# Altium PCB MalletteV2_PCB_2L.PcbDoc
Units mm, origin at the board's own origin, x right, y up, seen from the top; angles counter-clockwise.
Board outline 430 x 289.62 mm, 2 copper layers (Top, Bottom), stack 1.54 mm thick; 75 components, 46 nets, 351 pads, 17 vias.
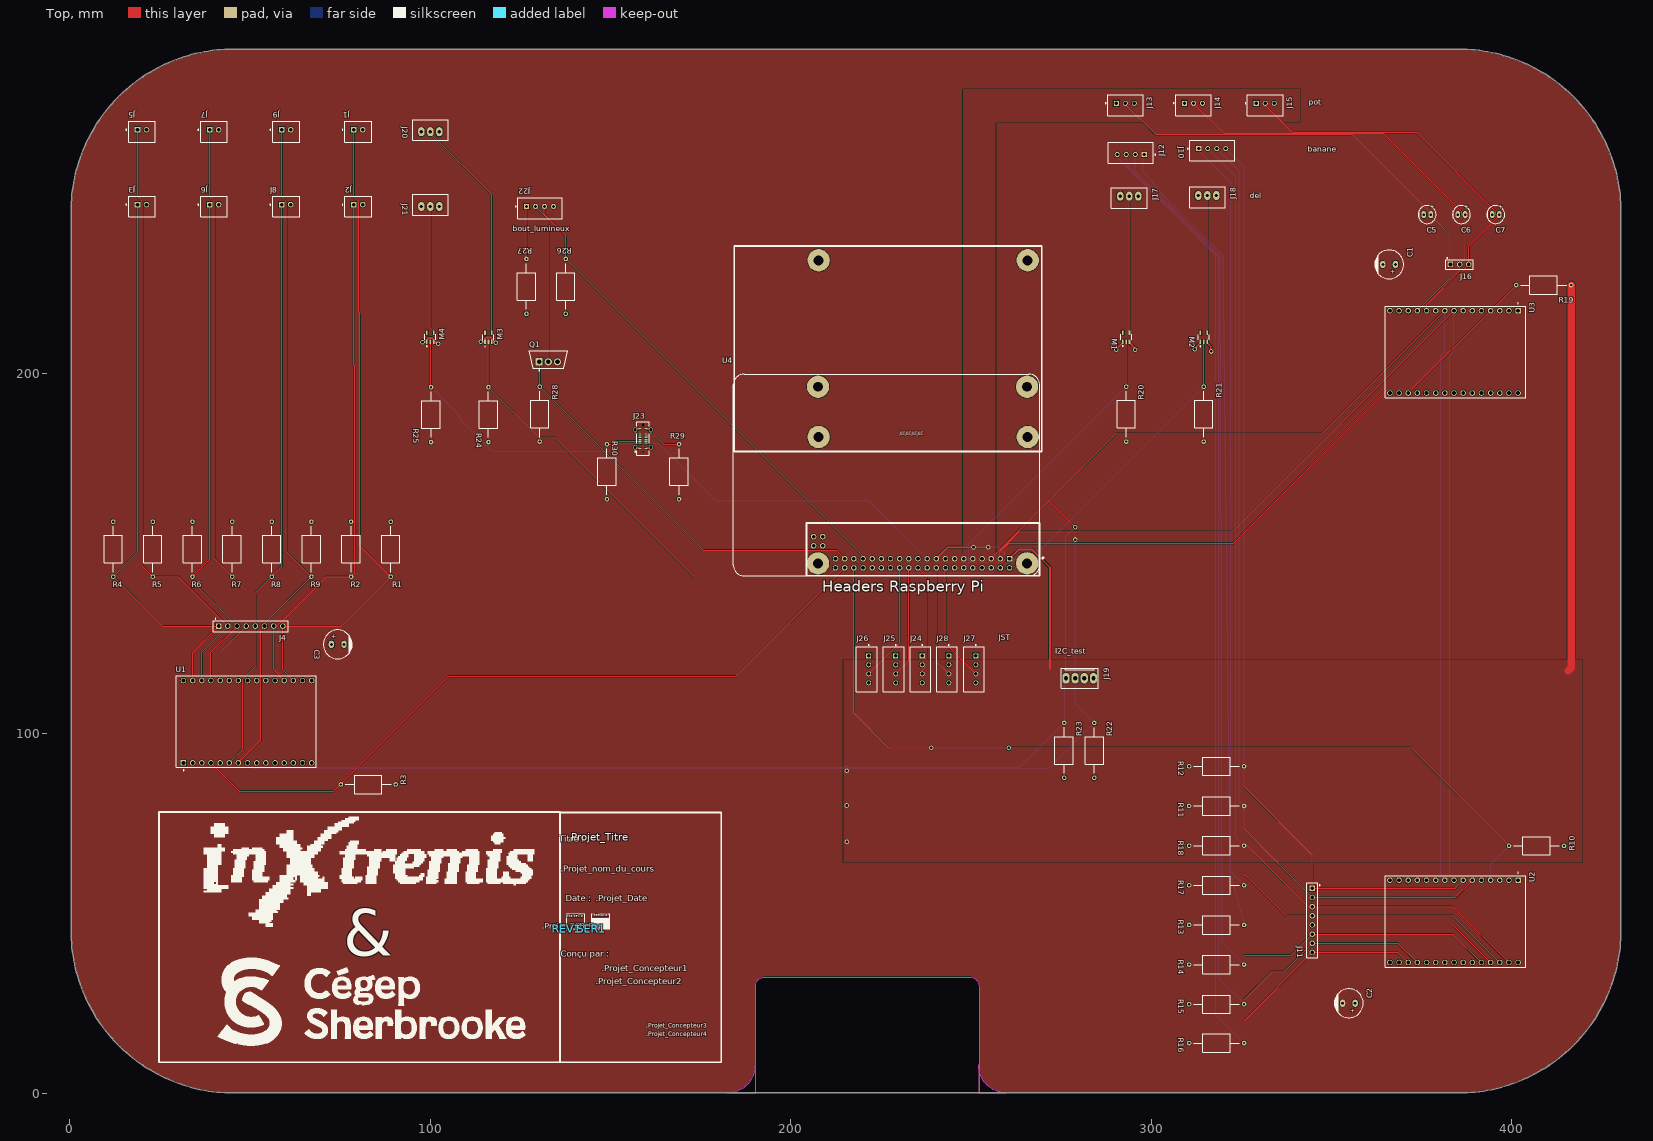
[diagram p0: Top view]
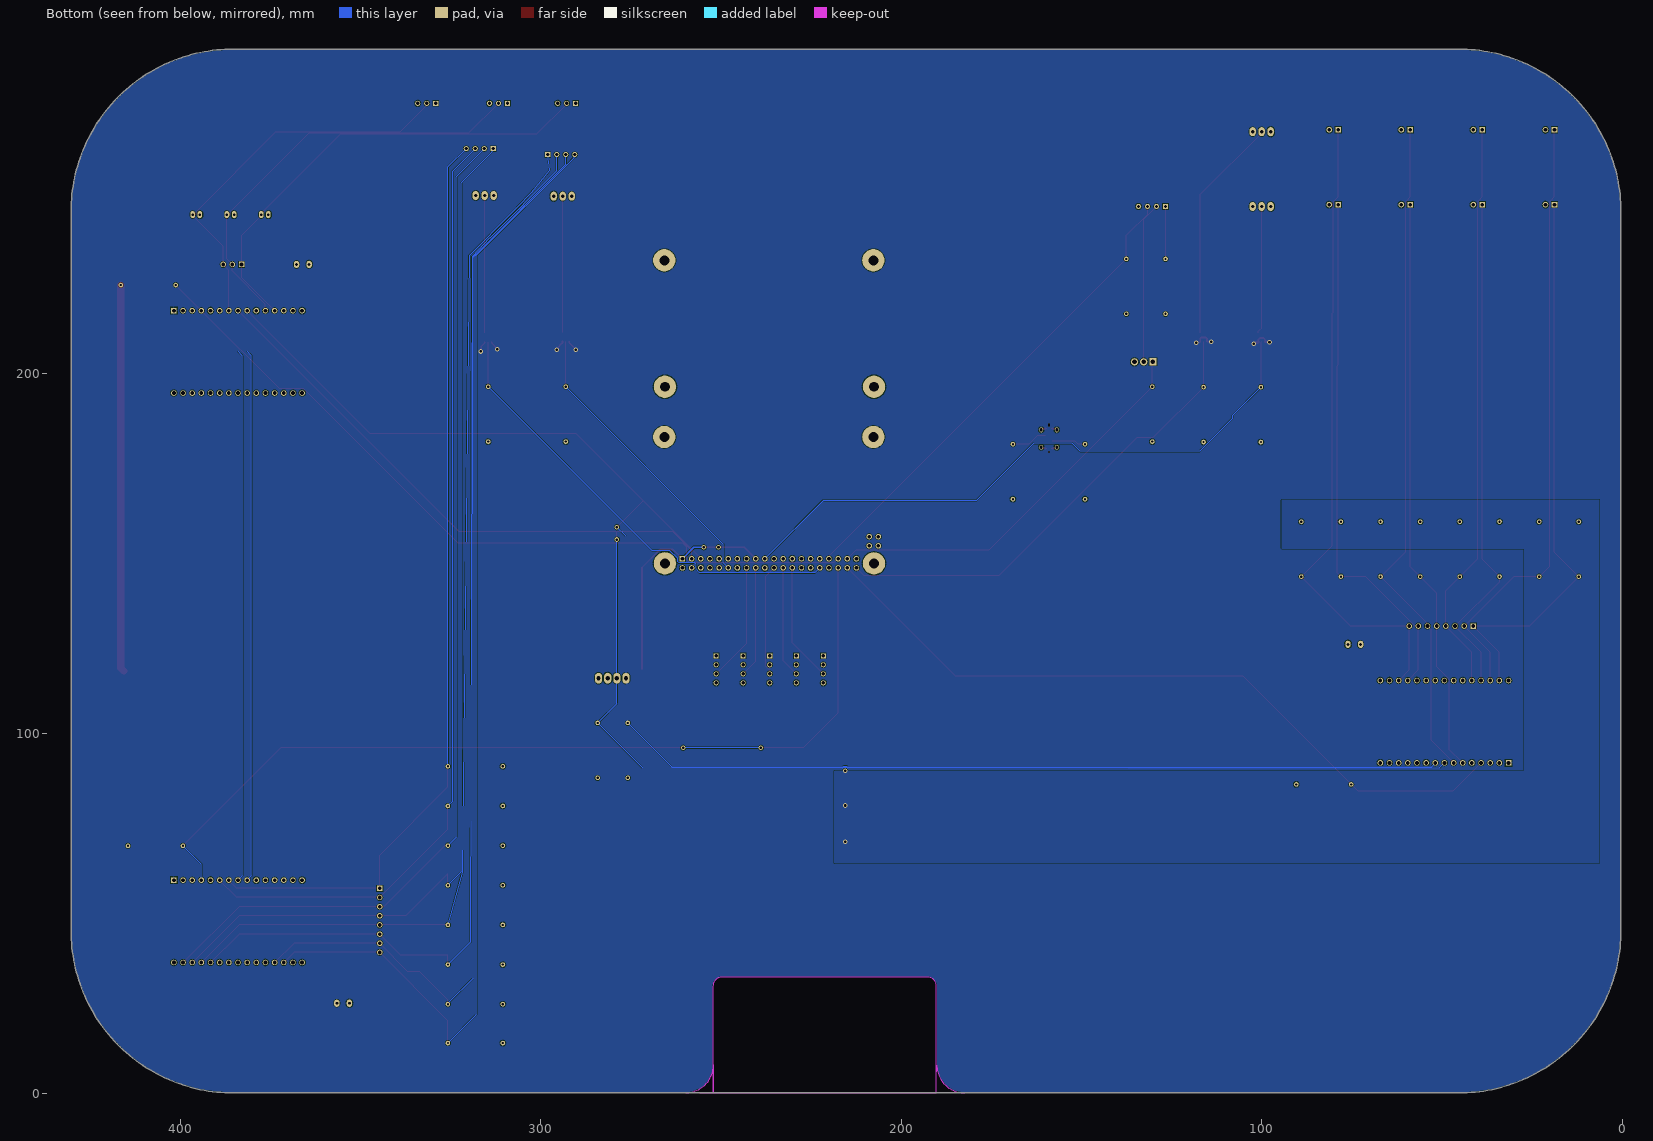
[diagram p1: Bottom view, seen from below]

## Layer stack, top to bottom
Top Solder: solder mask 0.0102, Solder Resist, Dk 3.5
Top: signal copper 0.035
Dielectric 1: core 1.47, FR-4, Dk 4.6
Bottom: signal copper 0.035
Bottom Solder: solder mask 0.0102, Solder Resist, Dk 3.5

## Board outline
0.318,45.254 0.318,244.873 cw(c45.318,244.873) 45.318,289.873 385.318,289.873 cw(c385.318,244.873) 430.318,244.873 430.318,45.254 cw(c385.318,45.254) 385.318,0.254 45.318,0.254 cw(c45.318,45.254)
cut-out: 190.246,0.254 190.246,29.845 cw(c192.786,29.845) 192.786,32.385 249.682,32.385 cw(c249.682,29.845) 252.222,29.845 252.222,0.254
cut-out: 190.09,8.001 cw(c182.343,8.001) 182.343,0.254 190.217,0.254 190.217,4.064
cut-out: 259.841,0.297 cw(c259.841,8.044) 252.094,8.044 252.094,0.17 255.904,0.17

## Design rules (kind name [scope] priority, off if disabled: settings)
BoardOutlineClearance [All] p1: gap=0.2 ignorepadtopadclearanceinfootprint=FALSE except(0: Arc-SplitContinuation Track-SplitContinuation SMDPad-SplitContinuation THPad-SplitContinuation Via-SplitContinuation Fill-SplitContinuation Poly-SplitContinuation Region-SplitContinuation Text-SplitContinuation)
Clearance [All] p1: gap=0.152 ignorepadtopadclearanceinfootprint=FALSE except(0: Arc-Hole Track-Hole SMDPad-Hole THPad-Hole Via-Hole Fill-Hole Poly-Hole Region-Hole Text-Hole; 0.127: Arc-Arc Arc-Track Track-Track SMDPad-Fill SMDPad-Poly SMDPad-Region; 0.2: Arc-SMDPad Track-SMDPad; 0.254: Arc-Via Track-Via Via-Via; 0.33: Arc-THPad Track-THPad; 0.5: THPad-THPad)
ComponentClearance [All] p1: gap=0.102 collisioncheckmode=3 verticalgap=0.102 showdistances=FALSE
HoleSize [All] p1: absolutevalues=TRUE maxlimit=6.3 minlimit=0.3 maxpercent=80.000 minpercent=20.000
HoleToHoleClearance [All] p1: gap=0.5 allowstackedmicrovias=FALSE
MinimumAnnularRing [All] p1: minimumring=0.1
MinimumSolderMaskSliver [All] p1: minsoldermaskwidth=0.1
PlaneClearance [All] p1: clearance=0.152
PlaneConnect [All] p1: pad.planeconnectstyle=Relief pad.reliefexpansion=0.508 pad.reliefentries=4 pad.reliefconductorwidth=0.254 pad.reliefairgap=0.254 via.planeconnectstyle=Direct via.reliefexpansion=0.508 via.reliefentries=4 via.reliefconductorwidth=0.254 via.reliefairgap=0.254
PolygonConnect [All] p1: thpad.connectstyle=Relief thpad.reliefconductorwidth=0.254 thpad.reliefentries=4 thpad.polygonreliefangle="90 Angle" thpad.airgapwidth=0.254 smdpad.connectstyle=Relief smdpad.reliefconductorwidth=0.254 smdpad.reliefentries=4 smdpad.polygonreliefangle="90 Angle" smdpad.airgapwidth=0.254 via.connectstyle=Direct via.reliefconductorwidth=0.254 via.reliefentries=4 via.polygonreliefangle="90 Angle" via.airgapwidth=0.254
RoutingVias [All] p1: holewidth=0.3 width=0.5 viastyle="Through Hole" minholewidth=0.3 minwidth=0.5 maxholewidth=6.3 maxwidth=6.5
SilkToSilkClearance [All] p1: silktosilkclearance=0.102
SilkToSolderMaskClearance [IsPad] p1: minsilkscreentomaskgap=0.024 clearancetoexposedcopper=FALSE
SolderMaskExpansion SolderMaskExpansion_Via [isVia] p1: expansion=0.102 istentingtop=TRUE
SolderMaskExpansion [All] p2: expansion=0.051 istentingtop=FALSE
Width [All] p1: maxlimit=25.4 minlimit=0.127 preferedwidth=0.152 minimp=50.000000 maximp=50.000000 favimp=50.000000
22 further rules are at their usual default settings.

## Classes and differential pairs
component class Alimentation_USB_Header: J23 R29 R30
component class Énigme3_Potentiomètres: C3 C5 C6 C7 J13 J14 J15 J16 R19 U3
component class Énigme2_Crocodile: C2 J10 J11 J12 R10 R11 R12 R13 R14 R15 R16 R17 R18 U2
component class Énigme1_Switch: C1 J1 J2 J3 J4 J5 J6 J7 J8 J9 R1 R2 R3 R4 R5 R6 R7 R8 R9 U1
component class Raspberry_Pi_4_ModelB: J17 J18 J19 J20 J21 J22 J24 J25 J26 J27 J28 ll M1 M2 M3 M4 Q1 R20 R21 R22 R23 R24 R25 R26 R27 R28 U4
component class Title_Page: REV1 SER1

## Components (designator, comment, footprint, x,y, rotation, side; value= is the part's Value field where it differs from the comment)
C1 "100 µF" "CAP AL TH D8 L3.5 H12.5" 366.012,230.124 r180 top
C2 "100 µF" "CAP AL TH D8 L3.5 H12.5" 354.838,25.146 r180 top
C3 "100 µF" "CAP AL TH D8 L3.5 H12.5" 74.295,124.718 r0 top
C5 "0.1µF" "CAP TH ALUM ELEC D5.00mm S2.00mm H12.00mm" 376.571,243.967 r0 top
C6 "0.1µF" "CAP TH ALUM ELEC D5.00mm S2.00mm H12.00mm" 386.08,243.967 r0 top
C7 "0.1µF" "CAP TH ALUM ELEC D5.00mm S2.00mm H12.00mm" 395.589,243.967 r0 top
J1 "B2B-XH-A(LF)(SN)" FP-B2B-XH-A_LF_SN-MFG 80,266.954 r0 top
J2 "B2B-XH-A(LF)(SN)" FP-B2B-XH-A_LF_SN-MFG 80,246.197 r0 top
J3 "B2B-XH-A(LF)(SN)" FP-B2B-XH-A_LF_SN-MFG 20,246.197 r0 top
J4 "CON_HDR_1X8" CON_HDR_1x8 50.165,129.794 r90 top
J5 "B2B-XH-A(LF)(SN)" FP-B2B-XH-A_LF_SN-MFG 20,266.954 r0 top
J6 "B2B-XH-A(LF)(SN)" FP-B2B-XH-A_LF_SN-MFG 40,246.197 r0 top
J7 "B2B-XH-A(LF)(SN)" FP-B2B-XH-A_LF_SN-MFG 40,266.954 r0 top
J8 "B2B-XH-A(LF)(SN)" FP-B2B-XH-A_LF_SN-MFG 60,246.197 r0 top
J9 "B2B-XH-A(LF)(SN)" FP-B2B-XH-A_LF_SN-MFG 60,266.954 r0 top
J10 "B4B-XH-A(LF)(SN)" FP-B4B-XH-A_LF_SN-MFG 316.932,261.73 r180 top
J11 "CON_HDR_1X8" CON_HDR_1x8 344.678,48.133 r0 top
J12 "B4B-XH-A(LF)(SN)" FP-B4B-XH-A_LF_SN-MFG 294.319,261.129 r0 top
J13 "B3B-XH-A(LF)(SN)" FP-B3B-XH-A_LF_SN-MFG 292.822,274.303 r0 top
J14 "B3B-XH-A(LF)(SN)" FP-B3B-XH-A_LF_SN-MFG 311.724,274.303 r0 top
J15 "B3B-XH-A(LF)(SN)" FP-B3B-XH-A_LF_SN-MFG 331.637,274.303 r0 top
J16 "CON_HDR_1X3" CON_HDR_1x3 385.572,230.124 r90 top
J17 "B3B-XH-A(LF)(SN)" "JST XH B3B-XH-A" 293.918,249.047 r0 top
J18 "B3B-XH-A(LF)(SN)" "JST XH B3B-XH-A" 315.575,249.247 r0 top
J19 "0022272041" "MOLEX KK 0022272041" 280.162,115.316 r180 top
J20 "B3B-XH-A(LF)(SN)" "JST XH B3B-XH-A" 100,266.954 r180 top
J21 "B3B-XH-A(LF)(SN)" "JST XH B3B-XH-A" 100,246.197 r180 top
J22 "B4B-XH-A(LF)(SN)" FP-B4B-XH-A_LF_SN-MFG 130.414,245.689 r180 top
J23 "USB4120-03-C" FP-USB4120-03-C-MFG 159,181.817 r90 top
J24 "B4B-XH-A(LF)(SN)" FP-B4B-XH-A_LF_SN-MFG 235.95,117.793 r90 top
J25 "B4B-XH-A(LF)(SN)" FP-B4B-XH-A_LF_SN-MFG 228.584,117.793 r90 top
J26 "B4B-XH-A(LF)(SN)" FP-B4B-XH-A_LF_SN-MFG 221.091,117.793 r90 top
J27 "B4B-XH-A(LF)(SN)" FP-B4B-XH-A_LF_SN-MFG 250.809,117.793 r90 top
J28 "B4B-XH-A(LF)(SN)" FP-B4B-XH-A_LF_SN-MFG 243.316,117.793 r90 top
M1 "74HC1G125GV-Q100H" SOT95P275X110-5N 293.05,209.956 r90 top
M2 "74HC1G125GV-Q100H" SOT95P275X110-5N 314.579,209.931 r90 top
M3 "74HC1G125GV-Q100H" SOT95P275X110-5N 116.102,209.892 r90 top
M4 "74HC1G125GV-Q100H" SOT95P275X110-5N 99.973,209.935 r90 top
Q1 "IRF520NPBF" FP-PG-TO220-3-MFG 132.715,203.708 r90 top
R1 "10 Kohm" Res_Template 89,143.51 r90 top
R2 "10 Kohm" Res_Template 78,143.51 r90 top
R3 "10 Kohm" Res_Template 75.149,85.844 r0 top
R4 "10 Kohm" Res_Template 12,143.51 r90 top
R5 "10 Kohm" Res_Template 23,143.51 r90 top
R6 "10 Kohm" Res_Template 34,143.51 r90 top
R7 "10 Kohm" Res_Template 45,143.51 r90 top
R8 "10 Kohm" Res_Template 56,143.51 r90 top
R9 "10 Kohm" Res_Template 67,143.51 r90 top
R10 "10 Kohm" Res_Template 399.281,68.834 r0 top
R11 "10 Kohm" Res_Template 310.515,79.873 r0 top
R12 "10 Kohm" Res_Template 310.515,90.873 r0 top
R13 "10 Kohm" Res_Template 310.515,46.873 r0 top
R14 "10 Kohm" Res_Template 310.515,35.873 r0 top
R15 "10 Kohm" Res_Template 310.515,24.873 r0 top
R16 "10 Kohm" Res_Template 310.515,14.097 r0 top
R17 "10 Kohm" Res_Template 310.515,57.873 r0 top
R18 "10 Kohm" Res_Template 310.515,68.873 r0 top
R19 "10 Kohm" Res_Template 401.278,224.409 r0 top
R20 "10 Kohm" Res_Template 293.05,180.975 r90 top
R21 "10 Kohm" Res_Template 314.579,180.975 r90 top
R22 "4.7 Kohm" Res_Template 284.226,102.911 r270 top
R23 "4.7 Kohm" Res_Template 275.844,87.677 r90 top
R24 "10 Kohm" Res_Template 116.102,180.848 r90 top
R25 "10 Kohm" Res_Template 100.203,180.848 r90 top
R26 "4.7 Kohm" Res_Template 137.541,231.648 r270 top
R27 "90 ohm" Res_Template 126.664,231.648 r270 top
R28 "4.7 Kohm" Res_Template 130.34,180.975 r90 top
R29 "5.1 Kohm" Res_Template 169,165 r90 top
R30 "5.1 Kohm" Res_Template 149,165 r90 top
REV1 "Revision Cartridge Mini" REV_REVISION_CARTRIDGE_MINI 137.89,45.84 r0 top
SER1 "Serial Cartridge MICRO" SER_SERIAL_CARTRIDGE_MICRO 144.748,45.84 r0 top
U1 "ESP32-C3-DEVKITC-02" XCVR_ESP32-C3-DEVKITC-02 48.895,103.251 r90 top
U2 "ESP32-C3-DEVKITC-02" XCVR_ESP32-C3-DEVKITC-02 384.394,47.879 r270 top
U3 "ESP32-C3-DEVKITC-02" XCVR_ESP32-C3-DEVKITC-02 384.394,205.867 r270 top
U4 "RASPBERRY_PI_4B_4GB" MODULE_RASPBERRY_PI_4B_4GB 226.557,171.693 r180 top

## Footprints (in the part's own frame and the unit in brackets; to place one, negate y for a bottom-side part, rotate by r counter-clockwise, add the part's x,y. Pads: shape width x height; smd on the part's side, far side on the other; paste and mask are expansions set on the pad)
"CAP AL TH D8 L3.5 H12.5" [mm] "8MM Diameter, 3.5MM Lead Spacing Aluminium Capacitor"
  oval 1.5x2 hole 0.8: 1(-1.75,0) 2(1.75,0)
  silkscreen extent -4,-4 4,4, body extent -4,-4 4,4, height 11.5
"CAP TH ALUM ELEC D5.00mm S2.00mm H12.00mm" [mm] "5mm Diameter 2mm Lead Spacing Aluminum Electrolytic Capacitors Radial, Can"
  oval 1.3x1.95 hole 0.7: 1(1,0) 2(-1,0)
  silkscreen extent -2.5,-2.5 2.5,2.5, body extent -2.51,-2.5 2.5,2.5, height 12
CON_HDR_1x3 [mil]
  rect 60x60 hole 40: 1(0,100)
  round 60 hole 40: 2(0,0) 3(0,-100)
  silkscreen extent -50,-150 75,150, body extent -49,-150 49,150, height 338
CON_HDR_1x8 [mil]
  rect 60x60 hole 40 mask+2.76: 1(0,350)
  round 60 hole 40 mask+2.76: 2(0,250) 3(0,150) 4(0,50) 5(0,-50) 6(0,-150) 7(0,-250) 8(0,-350)
  silkscreen extent -60,-410 85,410, body extent -50,-400 50,400, height 334
FP-B2B-XH-A_LF_SN-MFG [mm]
  rect 1.55x1.55 hole 1 paste-2539.97 mask+0: 1(-1.25,0.525)
  round 1.55 hole 1 paste-2539.97 mask+0: 2(1.25,0.525)
  silkscreen extent -4.5,-2.88 3.7,2.88, body extent -3.8,-2.98 3.8,2.98, height 0.25
FP-B3B-XH-A_LF_SN-MFG [mm]
  rect 1.4x1.4 hole 0.9 paste-2539.97 mask+0: 1(-2.5,0.525)
  round 1.4 hole 0.9 paste-2539.97 mask+0: 2(0,0.525) 3(2.5,0.525)
  silkscreen extent -5.6,-2.88 4.95,2.88, body extent -5.05,-2.98 5.05,2.98, height 0.25
FP-B4B-XH-A_LF_SN-MFG [mm]
  rect 1.4x1.4 hole 0.9 paste-2539.97 mask+0: 1(3.75,-0.525)
  round 1.4 hole 0.9 paste-2539.97 mask+0: 2(1.25,-0.525) 3(-1.25,-0.525) 4(-3.75,-0.525)
  silkscreen extent -6.2,-2.88 6.87,2.88, body extent -6.3,-2.98 6.3,2.98, height 0.25
FP-PG-TO220-3-MFG [mm]
  rect 2x2 hole 1.3 paste-2539.97 mask+0: 1(-0.61,2.54)
  round 2 hole 1.3 paste-2539.97 mask+0: 2(-0.61,0) 3(-0.61,-2.54)
  silkscreen extent -3.1,-5.38 2.41,5.38, body extent -2.51,-5.48 2.51,5.48, height 0.25
FP-USB4120-03-C-MFG [mm]
  rrect100% 1.35x1.1 hole 0.6 slot 0.85 at 0 deg paste-2539.97 mask+0: 1(-2.4,2.15) 2(2.4,2.15) 3(-2.4,-2.15) 4(2.4,-2.15)
  rect 0.3x0.87 smd paste+0 mask+0: A1(-2.75,0.865) A4(-1.25,0.865) A5(-0.75,0.865) A6(-0.25,0.865) A7(0.25,0.865) A8(0.75,0.865) A9(1.25,0.865) A12(2.75,0.865) B1(2.75,-0.865) B4(1.25,-0.865) B5(0.75,-0.865) B6(0.25,-0.865) B7(-0.25,-0.865) B8(-0.75,-0.865) B9(-1.25,-0.865) B12(-2.75,-0.865)
  round 0.52 hole 0.52 unplated paste-2539.97 mask+0: ""(-3.75,0)
  rrect100% 0.72x0.52 hole 0.52 slot 0.72 at 0 deg unplated paste-2539.97 mask+0: ""(3.75,0)
  silkscreen extent -4.59,-1.71 4.59,2.3, body extent -4.69,-2.8 4.69,2.8, height 0.25
"JST XH B3B-XH-A" [mm]
  oval 1.75x2.5 hole 0.9: 1(-2.5,0) 2(0,0) 3(2.5,0)
  silkscreen extent -4.95,-3.38 4.95,2.38, body extent -4.95,-3.38 4.95,2.38, height 7
MODULE_RASPBERRY_PI_4B_4GB [mil]
  rect 60x60 / inner round 60 / far side rect 60x60 hole 40: 1(-1343.7,914.57)
  round 60 hole 40: 2(-1343.7,1014.57) 3(-1243.7,914.57) 4(-1243.7,1014.57) 5(-1143.7,914.57) 6(-1143.7,1014.57) 7(-1043.7,914.57) 8(-1043.7,1014.57) 9(-943.7,914.57) 10(-943.7,1014.57) 11(-843.7,914.57) 12(-843.7,1014.57) 13(-743.7,914.57) 14(-743.7,1014.57) 15(-643.7,914.57) 16(-643.7,1014.57) 17(-543.7,914.57) 18(-543.7,1014.57) 19(-443.7,914.57) 20(-443.7,1014.57) 21(-343.7,914.57) 22(-343.7,1014.57) 23(-243.7,914.57) 24(-243.7,1014.57) 25(-143.7,914.57) 26(-143.7,1014.57) 27(-43.7,914.57) 28(-43.7,1014.57) 29(56.3,914.57) 30(56.3,1014.57) 31(156.3,914.57) 32(156.3,1014.57) 33(256.3,914.57) 34(256.3,1014.57) 35(356.3,914.57) 36(356.3,1014.57) 37(456.3,914.57) 38(456.3,1014.57) 39(556.3,914.57) 40(556.3,1014.57) 41(796.46,673.5) 42(796.46,773.5) 43(696.46,673.5) 44(696.46,773.5)
  round 244.09 hole 108.27: S1(-1535.43,964.57) S2(748.03,964.57) S3(748.03,-964.57) S4(-1535.43,-964.57)
  silkscreen extent -1717,-1102 1673,1102
"MOLEX KK 0022272041" [mm]
  oval 2x3 hole 1.2: 1(-3.81,0) 2(-1.27,0) 3(1.27,0) 4(3.81,0)
  silkscreen extent -5.08,-2.79 5.08,2.79, body extent -5.08,-2.9 5.08,2.9, height 11.7
Res_Template [mm]
  round 1.27 hole 0.635: 1(0,0) 2(15.24,0)
  silkscreen extent 1.27,-2.54 13.97,2.54
REV_REVISION_CARTRIDGE_MINI [mm]
  silkscreen extent 0,0 5,4.08
SER_SERIAL_CARTRIDGE_MICRO [mm]
  silkscreen extent 0,0 5.02,4.08
SOT95P275X110-5N [mm]
  rrect25% 1.22x0.5 smd: 1(-1.245,0.95) 2(-1.245,0) 3(-1.245,-0.95) 4(1.245,-0.95) 5(1.245,0.95)
  silkscreen extent -2.6,-1.52 0.75,1.52, body extent -1.38,-1.45 1.38,1.45, height 1.1
XCVR_ESP32-C3-DEVKITC-02 [mm]
  rect 1.53x1.53 hole 1.02: 1(-11.43,17.392)
  round 1.53 hole 1.02: 2(-11.43,14.852) 3(-11.43,12.312) 4(-11.43,9.772) 5(-11.43,7.232) 6(-11.43,4.692) 7(-11.43,2.152) 8(-11.43,-0.388) 9(-11.43,-2.928) 10(-11.43,-5.468) 11(-11.43,-8.008) 12(-11.43,-10.548) 13(-11.43,-13.088) 14(-11.43,-15.628) 15(-11.43,-18.168) 16(11.43,-18.168) 17(11.43,-15.628) 18(11.43,-13.088) 19(11.43,-10.548) 20(11.43,-8.008) 21(11.43,-5.468) 22(11.43,-2.928) 23(11.43,-0.388) 24(11.43,2.152) 25(11.43,4.692) 26(11.43,7.232) 27(11.43,9.772) 28(11.43,12.312) 29(11.43,14.852) 30(11.43,17.392)
  silkscreen extent -13.56,-19.46 12.7,19.46

## Part data
C1 C2 C3: library part 860020674015, "CAP ALUM 100UF 20% 50V RADIAL", Device Package="Radial, Can", Lifetime @ Temp.="2000 Hrs @ 105°C", manufacturer="Würth Elektronik", Operating Temperature="-40°C ~ 105°C", Ripple Current @ High Frequency="306 mA @ 100 kHz", Ripple Current @ Low Frequency="200 mA @ 120 Hz", Supplier Part Number 1=732-8861-1-ND, Tolerance=±20%, Voltage - Rated="50 V", Applications="General Purpose", Capacitance="100 µF", ComponentLink1Description=Datasheet, ComponentLink1URL=https://katalog.we-online.de/pbs/datasheet/860020674015.pdf, componentlink2description="DigiKey Link", componentlink2url=https://www.digikey.com/en/products/detail/würth-elektronik/860020674015/5727098, Height - Seated (Max)="0.492\" (12.50mm)", lastupdated="2024-06-03 20:06:11", Lead Spacing="0.138\" (3.50mm)", Lifecycle Status=Active, Minimum Order=1, Mounting Type="Through Hole", Package / Case="Radial, Can", Packaging=TapeAndBox, Part Number=860020674015, Part Status=Active, partid=7238, Polarization=Polar, Price=0.16, Series=WCAP-ATG5, Size / Dimension="0.315\" Dia (8.00mm)", Supplier 1=DigiKey
C5 C6 C7: library part UKL2A0R1KDD, "CAP ALUM 0.1UF 10% 100V RADIAL", Device Package="Radial, Can", Lifetime @ Temp.="2000 Hrs @ 85°C", manufacturer=Nichicon, Operating Temperature="-40°C ~ 85°C", Ripple Current @ High Frequency="4.2mA @ 10kHz", Ripple Current @ Low Frequency="2.1mA @ 120Hz", Supplier Part Number 1=493-16876-ND, Tolerance=±10%, Voltage - Rated=100V, Applications="General Purpose", Capacitance=0.1µF, ComponentLink1Description=Datasheet, ComponentLink1URL=http://nichicon-us.com/english/products/pdfs/e-ukl.pdf, componentlink2description="DigiKey Link", componentlink2url=http://digikey.com/product-detail/en/nichicon/UKL2A0R1KDD/493-16876-ND/2598554, Height - Seated (Max)="0.472\" (12.00mm)", lastupdated="2020-09-04 23:28:57", Lead Spacing="0.079\" (2.00mm)", Lifecycle Status=Active, Minimum Order=1, Mounting Type="Through Hole", Package / Case="Radial, Can", Packaging=Bulk, Part Number=UKL2A0R1KDD, Part Status=Active, partid=21583, Polarization=Polar, Price=0.39, Series=UKL, Size / Dimension="0.197\" Dia (5.00mm)", Supplier 1=DigiKey
J1 J2 J3 J5 J6 J7 J8 J9: library part CMP-2000-05888-3, "CONN HEADER VERT 2POS 2.5MM", Color=Natural, Contact Resistance=20mR, Current Rating=3A, Housing Color=White, Insulation Resistance=1GR, Max Operating Temperature=85°C, Max Voltage Rating (AC)=250V, Min Operating Temperature=-25°C, Connector Type="Male Pin", Contact Material=Brass, Contact Plating=Tin, Contact Type="Male Pin", Depth=5.75mm, Fastening Type=Detent, Housing Material=Polyamide, Lead Free="Lead Free", Lead Pitch=2.5mm, Length=7.4mm, Max Current Rating=3A, Max Voltage Rating (DC)=250V, Mount="Through Hole", Number of Contacts=2, Number of Positions=2, Number of Rows=1, Orientation=Straight, Packaging=Bulk, Pitch=2.5mm, REACH SVHC="No SVHC", Series=XH, Termination=Solder, Voltage Rating=250V, Voltage Rating (AC)=250V, Wire/Cable Gauge=22AWG
J4 J11: library part CMP-005-000004-1, "CON - Header 1X8 pins, 100Mils - TH-8", Package=TH-8, Assembly Type=TH, Component Type=Standard, Design Item ID=CON_HDR_1X8, Pin Count=8, Polarized=No, Source=CEGEP_SHERBROOKE_TGE_LIBRARY.SchLib
J10 J12 J22 J24 J25 J26 J27 J28: library part CMP-17439-000250-1, "CONN HEADER VERT 4POS 2.5MM", Color=Natural, Contact Resistance=20mR, Current Rating=3A, Flammability Rating="UL94 V-0", Housing Color=White, Insulation Resistance=1GR, Max Operating Temperature=85°C, Max Voltage Rating (AC)=250V, Min Operating Temperature=-25°C, Package Quantity=500, Connector Type=Header, Contact Finish - Mating=TIN, Contact Material=Brass, Contact Plating=Tin, Contact Shape=Square, Contact Type="Male Pin", Depth=5.75mm, Fastening Type=Detent, Gender=Male, Housing Material=Polyamide, Insulation Color=Natural, Insulation Material=Nylon, Lead Free="Lead Free", Lead Pitch=2.5mm, Length=12.4mm, Mated Stacking Heights=9.8mm, Material=Polyamide, Max Current Rating=3A, Max Voltage Rating (DC)=250V, Mount="Through Hole", Number of Contacts=4, Number of Positions=4, Number of Rows=1, Orientation=Straight, Packaging=Bulk, Pitch=2.5mm, REACH SVHC="No SVHC", Series=XH, Termination=Solder, Voltage Rating=250V, Voltage Rating (AC)=250V, Wire/Cable Gauge=22AWG
J13 J14 J15: library part CMP-17439-000014-3, "CONN HEADER VERT 3POS 2.5MM", Color=Natural, Contact Resistance=20mR, Current Rating=3A, Flammability Rating="UL94 V-0", Housing Color=White, Insulation Resistance=1GR, Max Operating Temperature=85°C, Max Voltage Rating (AC)=250V, Min Operating Temperature=-25°C, Connector Type=Header, Contact Finish - Mating=TIN, Contact Material=Brass, Contact Plating=Tin, Contact Shape=Square, Contact Type="Male Pin", Depth=5.75mm, Fastening Type=Detent, Gender=Male, Housing Material=Polyamide, Insulation Color=Natural, Insulation Material=Nylon, Lead Free="Lead Free", Lead Pitch=2.5mm, Length=9.9mm, Max Current Rating=3A, Max Voltage Rating (DC)=250V, Mount="Through Hole", Number of Contacts=3, Number of Positions=3, Number of Rows=1, Orientation=Straight, Packaging=Bulk, Pitch=2.5mm, REACH SVHC="No SVHC", Series=XH, Termination=Solder, Voltage Rating=250V, Voltage Rating (AC)=250V, Wire/Cable Gauge=22AWG
J16: library part CMP-005-000001-1, "CON - Header 1x3 pins-100Mils - TH", Package=TH, Assembly Type=TH, Component Type=Standard, Design Item ID=CON_HDR_1X3, Pin Count=3, Polarized=No, Source=CEGEP_SHERBROOKE_TGE_LIBRARY.SchLib
J17 J18 J20 J21: "CONN HEADER VERT 3POS 2.5MM", Current Rating (Amps)=3A, Insulation Color=Natural, manufacturer="JST Sales America Inc.", Material Flammability Rating="UL94 V-0", Operating Temperature="-25°C ~ 85°C", Supplier Part Number 1=455-2248-ND, Voltage Rating=250V, ComponentLink1Description=Datasheet, ComponentLink1URL=http://www.jst-mfg.com/product/pdf/eng/eXH.pdf, componentlink2description="DigiKey Link", componentlink2url=http://digikey.com/product-detail/en/jst-sales-america-inc/B3B-XH-A-LF-SN/455-2248-ND/1651046, Connector Type=Header, Contact Finish - Mating=Tin, Contact Finish - Post=Tin, Contact Length - Post="0.134\" (3.40mm)", Contact Material=Brass, Contact Shape=Square, Contact Type="Male Pin", Fastening Type="Detent Lock", Insulation Height="0.276\" (7.00mm)", Insulation Material="Polyamide (PA66), Nylon 6/6", lastupdated="2020-01-12 23:46:22", Lifecycle Status=Active, Minimum Order=1, Mounting Type="Through Hole", Number of Positions=3, Number of Positions Loaded=All, Number of Rows=1, Packaging=Bulk, Part Number=B3B-XH-A(LF)(SN), Part Status=Active, partid=68, Pitch - Mating="0.098\" (2.50mm)", Price=0.19, Series=XH, Shrouding="Shrouded - 4 Wall", Style="Board to Cable/Wire", Supplier 1=DigiKey, Termination="Press-Fit, Solder"
J19: "CONN HEADER VERT 4POS 2.54MM", Part Number=0022272041
J23: library part CMP-03329-113696351-1, "USB4120-03-C 16 Position 48 VDC USB Type C Vertical USB 2.0 Receptacle Connector", NexarPartId=113696351, Number of Pins=16, Orientation=Vertical
M1 M2 M3 M4: library part "74HC1G125GV-Q100H NXP Semiconductors", "Bus Driver, HC/UH Series, 1-Func, 1-Bit, True Output, CMOS, PDSO5", Supply Voltage-Max=6V, Supply Voltage-Min=2V, Supply Voltage-Nominal=5V, ComponentLink1Description="New link", ComponentLink1URL=https://www.snapeda.com/parts/74HC1G125GV-Q100H/Nexperia/view-part/?welcome=home&ref=octopart, Surface Mount=Yes
Q1: library part CMP-32901-000276-1, "MOSFET N-CH 100V 9.7A TO-220AB", Case/Package=TO-220, Continuous Drain Current (ID)=9.7A, Drain To Source Breakdown Voltage=100V, Drain To Source Resistance=200mR, Gate to Source Voltage (Vgs)=20V, Input Capacitance=330pF, Max Operating Temperature=175°C, Max Power Dissipation=48W, Min Operating Temperature=-55°C, Threshold Voltage=4V, Contact Plating=Tin, Drain to Source Voltage (Vdss)=100V, Element Configuration=Single, Halogen Free="Halogen Free", Height=0.6inch, Lead Free="Lead Free", Length=0.414inch, Max Dual Supply Voltage=100V, Mount="Through Hole", Number of Pins=3, Packaging=Rail/Tube, Power Dissipation=48W, Rds On Max=200mR, REACH SVHC="No SVHC", Rise Time=23ns, RoHS Compliant=Yes, Turn-Off Delay Time=32ns, Turn-On Delay Time=4.5ns, Width=0.185inch
R1 R2 R3 R4 R5 R6 R7 R8 R9 R10 R11 R12 R13 R14 R15 R16 R17 R18 R19 R20 R21 R22 R23 R24 R25 R26 R27 R28 R29 R30: library part "470 ohm", "Custom Semiconductor Resistor"
REV1: library part REV_REVISION_CARTRIDGE_MINI, "REV - REVISION CARTRIDGE MINI", Assembly Type=NONE, Rule="Component Clearance Constraint [Horizontal Clearance = 0mil    Vertical Clearance = 0mil]"
SER1: library part SER_SERIAL_CARTRIDGE_MICRO, "SER - SERIAL CARTRIDGE MICRO", Assembly Type=NONE, Rule="Component Clearance Constraint [Horizontal Clearance = 0mil    Vertical Clearance = 0mil]"
U1 U2 U3: "Development Boards & Kits - Wireless (Engineering Samples) ESP32-C3 General-Purpose Development Board, embeds ESP32-C3-WROOM-02, 4 MB Flash, with Pin Header", Package=None, Availability="In Stock", Check_prices=https://www.snapeda.com/parts/ESP32-C3-DevKitC-02/Espressif+Systems/view-part/?ref=eda, ComponentLink1Description="New link", ComponentLink1URL=https://docs.espressif.com/projects/esp-idf/en/v5.2/esp32c3/hw-reference/esp32c3/user-guide-devkitc-02.html, MF="Espressif Systems", MP=ESP32-C3-DevKitC-02, Price=12.94$, Purchase-URL=https://www.digikey.ca/en/products/detail/espressif-systems/ESP32-C3-DEVKITC-02/14553009?gclsrc=aw.ds&&utm_adgroup=&utm_source=google&utm_medium=cpc&utm_campaign=PMax%20Product_Low%20ROAS%20Categories&utm_term=&productid=14553009&utm_content=&utm_id=go_cmp-20291741422_adg-_ad-__dev-c_ext-_prd-14553009_sig-CjwKCAiAh6y9BhBREiwApBLHC_cF2gDRygapSaJLXU2Wdnx3_ghIaBBBCKe6dQeqHq45MeITmry7OBoCG4EQAvD_BwE&gad_source=1&gclid=CjwKCAiAh6y9BhBREiwApBLHC_cF2gDRygapSaJLXU2Wdnx3_ghIaBBBCKe6dQeqHq45MeITmry7OBoCG4EQAvD_BwE, SnapEDA_Link=https://www.snapeda.com/parts/ESP32-C3-DevKitC-02/Espressif+Systems/view-part/?ref=snap
U4: "BCM2711 Raspberry Pi 4 Model B 4GB - ARMÂ® CortexÂ®-A72 MPU Embedded Evaluation Board", Package=None, Availability="In Stock", Check_prices=https://www.snapeda.com/parts/RASPBERRY%20PI%204B/4GB/Raspberry+Pi/view-part/?ref=eda, MF="Raspberry Pi", MP="RASPBERRY PI 4B/4GB", Price=None, Purchase-URL="https://pricing.snapeda.com/search/part/RASPBERRY PI 4B/4GB/?ref=eda", SnapEDA_Link=https://www.snapeda.com/parts/RASPBERRY%20PI%204B/4GB/Raspberry+Pi/view-part/?ref=snap

## Free pads (board coordinates)
  round 6.2 hole 2.75: 2(207.728,182.245) 2(207.728,231.267) 2(265.728,182.245) 2(265.728,231.267)

## Via types
v1: diameter 1.27, hole 0.711, Top to Bottom, tented both sides, 17 vias

## Nets (pads, with @x,y where several pads share a name; then routed paths per layer and width w, separated by ;. In a path a pad name is that pad's centre, name@x,y a point inside that pad or via, vN(x,y) a via of type N, cw(c..) or ccw(c..) an arc to the next point about the centre after c; other vN are vias at no path point)
3V3: J13.1 J14.1 J15.1 J19.1 J24.2 J25.2 J26.2 J27.2 J28.2 R1.2 R2.2 R3.2 R4.2 R5.2 R6.2 R7.2 R8.2 R9.2 R10.2 R19.2 R22.2 R23.1 U4.1 U4.17 | length 172.9
  Top w0.5: U4.17 243.551,151.647 v1(250.698,151.647) v1(254.762,151.647) ; U4.1 263.227,151.003 266.951,151.003 271.907,146.047 271.907,117.793
  Top w2: 415.671,117.348 416.518,118.195 R19.2
  Bottom w0.5: v1(254.762,151.647) 257.503,151.647 U4.1
  other v1: 215.519,70 215.519,80 215.519,89.685
GND: C1.2 C2.2 C3.2 C5.2 C6.2 C7.2 J1.2 J2.2 J3.2 J5.2 J6.2 J7.2 J8.2 J9.2 J13.3 J14.3 J15.3 J17.3 J18.3 J19.2 J20.3 J21.3 J22.4 J23.1 J23.2 J23.3 J23.4 J23.A1 J23.A12 J23.B1 J23.B12 J24.4 J25.4 J26.4 J27.4 J28.4 M1.1 M1.3 M2.1 M2.3 M3.1 M3.3 M4.1 M4.3 Q1.3 R11.1 R12.1 R13.1 R14.1 R15.1 R16.1 R17.1 R18.1 R20.1 R21.1 R24.1 R25.1 R28.1 R29.1 R30.1 U1.1 U1.5 U1.10 U1.15 U1.16 U1.17 U1.20 U1.23 U1.25 U1.30 U2.1 U2.5 U2.10 U2.15 U2.16 U2.17 U2.20 U2.23 U2.25 U2.30 U3.1 U3.5 U3.10 U3.15 U3.16 U3.17 U3.20 U3.23 U3.25 U3.30 U4.6 U4.9 U4.14 U4.20 U4.25 U4.30 U4.34 U4.39 U4.S1 U4.S2 U4.S3 U4.S4 | length 30.4
  Top w0.5: U1.15 U1.15@67.155,91.729 ; v1(97.814,208.58) v1@97.869,208.635 ; M4.1@99.023,208.635 M4.1 99.023,209.05 99.148,209.175 99.148,209.325 99.573,209.75 100.373,209.75 100.923,209.2 M4.3 ; R25.1@100.203,180.64 R25.1 ; v1(114.022,208.647) M3.1 115.152,209.599 115.445,209.892 116.759,209.892 117.052,209.599 M3.3 117.052,208.508 117.994,208.508 v1(118.134,208.368) ; J23.1 157.09,179.177 157.94,179.177 158.05,179.067 J23.A1 ; J23.2 157.09,184.457 157.94,184.457 158.05,184.567 J23.A12 ; J23.B12 159.95,179.067 160.06,179.177 160.91,179.177 J23.3 ; J23.B1 159.95,184.567 160.06,184.457 160.91,184.457 J23.4 ; v1(290.292,206.502) 290.292,206.543 292.1,208.351 M1.1 ; M1.3 294,208.351 295.443,206.908 295.443,206.649 v1(295.59,206.502) ; v1(312.039,206.606) 312.039,206.736 313.629,208.326 M2.1 ; M2.3 315.529,208.326 316.494,207.361 316.494,206.117 v1(316.636,205.976)
  Top w0.75: v1@97.869,208.635 M4.1@99.023,208.635 ; M4.3 100.923,208.58 101.048,208.455 101.679,208.455 101.991,208.142 v1(102.132,208.142)
NetJ17_2: J17.2 M1.4 | length 37.9
  Top w0.15: J17.2 293.959,249.006 293.959,211.242 M1.4
NetJ18_2: J18.2 M2.4 | length 38.1
  Top w0.15: M2.4 315.552,211.199 315.552,249.224 J18.2
  Top w1.25: J18.2 J18.2@315.58,249.252
NetJ20_2: J20.2 M3.4 | length 62.9
  Top w0.15: J20.2 100,266.579 117.052,249.527 M3.4
NetJ21_2: J21.2 M4.4 | length 35.4
  Top w0.15: J21.2 100,212.463 100.923,211.54 M4.4
NetJ22_1: J22.1 R27.1 | length 14.6
  Top w0.15: R27.1 J22.1
NetJ22_2: J22.2 Q1.2 | length 44.6
  Top w0.15: J22.2 132.715,242.663 Q1.2
NetJ23_A5: J23.A5 R30.2 | length 9.6
  Top w0.15: R30.2 150.84,180.24 151.511,180.911
  Top w0.152: 151.511,180.911 151.667,181.067 J23.A5 J23.A5@158.266,181.067
NetJ23_B5: J23.B5 R29.2 | length 10
  Top w0.152: J23.B5@159.996,182.567 162.238,182.567 164.565,180.24 R29.2
PIN_CROCO_0: J10.2 J11.3 R18.2 U2.29 | length 284.6
  Top w0.15: R18.2 325.833,68.951 326.527,68.951 343.535,51.943 J11.3 383.66,51.943 U2.29@399.281,36.322
  Bottom w0.15: J10.2 323.469,254.468 323.469,71.159 R18.2
PIN_CROCO_1: J10.1 J11.4 R17.2 U2.28 | length 294
  Top w0.15: R17.2 325.755,61.048 337.4,49.403 J11.4 383.66,49.403 U2.28@396.741,36.322
  Bottom w0.15: J10.1 313.471,261.966 313.471,261.418 322.072,252.817 322.072,61.556 R17.2
PIN_CROCO_2: J11.5 J12.1 R13.2 U2.27 | length 296
  Top w0.15: R13.2 336.887,46.873 336.897,46.863 J11.5 383.66,46.863 U2.27@394.201,36.322
  Bottom w0.15: J12.1 297.552,256.34 297.551,256.331 297.551,256.27 297.73,256.042 ccw(c398.972,335.395) 308.028,244.422 319.856,232.594 319.857,232.533 321.795,61.441 R13.2
PIN_CROCO_3: J11.6 J12.2 R14.2 U2.26 | length 311.2
  Top w0.15: R14.2 325.755,38.481 338.836,38.481 J11.6 383.66,44.323 U2.26@391.661,36.322
  Bottom w0.15: J12.2 295.569,256.071 314.228,237.412 ; 314.231,237.409 319.047,232.281 319.532,42.096 319.576,42.052 R14.2
PIN_CROCO_4: J10.3 J11.2 R11.2 U2.6 | length 265.1
  Top w0.15: R11.2 325.755,73.48 344.678,54.557 J11.2 384.422,54.483 U2.6@389.121,59.182
  Bottom w0.15: J10.3 324.485,255.952 324.485,81.143 R11.2
PIN_CROCO_5: J10.4 J11.1 R12.2 U2.7 | length 258
  Top w0.15: R12.2 325.755,85.155 344.678,66.232 J11.1 384.422,57.023 U2.7@386.581,59.182
  Bottom w0.15: J10.4 325.755,257.182 R12.2
PIN_CROCO_18: J11.8 J12.4 R16.2 U2.18 | length 321.9
  Top w0.15: R16.2 325.755,20.32 J11.8 368.42,39.243 U2.18@371.341,36.322
  Bottom w0.15: J12.4 290.759,260.414 290.759,259.786 317.881,232.664 317.881,21.971 R16.2
PIN_CROCO_19: J11.7 J12.3 R15.2 U2.19 | length 307.9
  Top w0.15: R15.2 325.755,26.162 333.541,33.948 336.843,33.948 J11.7 368.42,41.783 U2.19@373.881,36.322
  Bottom w0.15: J12.3@293.069,261.135 293.069,257.868 318.77,232.167 318.77,32.131 325.755,25.146 R15.2
PIN_PI_10: M4.2 R25.2 U4.19 | length 172.3
  Top w0.15: M4.2 100.088,208.575 100.088,196.203 R25.2
  Bottom w0.15: R25.2 108.044,188.247 108.044,187.435 117.171,178.308 150.379,178.308 152.568,180.497 163.281,180.497 179.167,164.611 221.679,164.611 U4.19
PIN_PI_12: M2.2 R21.2 U4.32 | length 127.7
  Top w0.15: R21.2 M2.2
  Bottom w0.15: U4.32 223.955,144.555 255.361,144.555 255.406,144.551 ccw(c255.491,145.617) 256.247,144.861 ccw(c254.15,146.958) 256.998,146.131 ccw(c256.854,146.172) 257.001,146.143 cw(c258.147,145.923) 257.038,146.287 ccw(c256.895,146.333) 257.041,146.299 ccw(c254.15,146.958) 257.11,147.138 cw(c257.26,147.146) 257.111,147.162 257.116,147.208 257.146,147.244 cw(c257.26,147.146) 257.161,147.259 257.204,147.296 261.647,147.296 262.052,147.701 262.052,148.645 264.156,150.749 269.113,150.749 R21.2
PIN_PI_13: J22.3 R26.1 U4.33 | length 134.4
  Top w0.15: J22.3 131.664,244.106 137.541,238.229 R26.1 219.784,149.405 219.784,148.726 U4.33
PIN_PI_17: J24.3 U4.22 | length 30.8
  Top w0.15: U4.22 237.58,143.63 237.58,118.585 236.475,117.48 J24.3
PIN_PI_18: M1.2 R20.2 U4.12 | length 81.5
  Top w0.15: R20.2 M1.2
  Bottom w0.15: U4.12 249.36,147.296 249.36,152.525 R20.2
PIN_PI_21: M3.2 R24.2 U4.40 | length 131.5
  Top w0.15: M3.2 R24.2 130.175,182.015 134.596,182.015 172.923,143.688 210.192,143.688 U4.40
PIN_PI_22: J26.3 U4.26 | length 32.9
  Top w0.15: J26.3 230.207,125.134 U4.26
PIN_PI_23: J27.3 U4.16 | length 32.9
  Top w0.15: U4.16 242.907,124.97 J27.3
PIN_PI_24: J28.3 U4.18 | length 30.8
  Top w0.15: U4.18 240.367,120.017 J28.3
PIN_PI_26: Q1.1 R28.2 U4.37 | length 111.4
  Top w0.15: Q1.1 130.34,202.933 R28.2 175.676,150.879 212.551,150.879 U4.37
PIN_PI_27: J25.3 U4.24 | length 30.9
  Top w0.15: J25.3 232.747,120.181 U4.24
PIN_POT_0: C5.1 J13.2 J16.1 U3.12 | length 130.4
  Top w0.15: J13.2@292.822,274.574 301.204,266.192 355.671,266.192 C5.1@377.571,244.292 ; U3.12 383.032,226.483 J16.1 383.032,238.181 C5.1@377.571,243.642 ; C5.1@377.571,243.554 377.571,243.879 C5.1@377.571,244.204
PIN_POT_1: C6.1 J14.2 J16.2 U3.11 | length 119.6
  Top w0.15: J14.2 320.083,266.469 364.395,266.469 386.135,244.729 ; U3.11 376.386,219.118 385.572,228.304 J16.2 387.08,231.632 C6.1 ; 386.135,244.641 386.135,243.967 386.223,243.879 C6.1@387.08,243.879
PIN_POT_2: C7.1 J15.2 J16.3 U3.7 | length 108.7
  Top w0.15: J15.2@331.637,274.303 339.194,266.746 373.627,266.746 395.644,244.729 ; U3.7 386.546,228.558 J16.3 388.112,235.165 C7.1@396.589,243.642 ; 395.644,244.641 395.644,243.967 395.732,243.879 396.589,243.879 C7.1@396.589,243.554
PIN_SW_0: J3.1 J4.1 R4.1 U1.29 | length 159.1
  Top w0.15: J3.1 18.75,150.26 R4.1 25.716,129.794 J4.1 34.043,122.562 U1.29
PIN_SW_1: J4.2 J5.1 R5.1 U1.28 | length 170.3
  Top w0.15: J5.1 18.75,248.845 20.07,247.525 20.07,146.44 R5.1 30.099,143.51 J4.2 36.583,122.562 U1.28
PIN_SW_2: J4.3 J6.1 R6.1 U1.27 | length 142.1
  Top w0.15: J6.1 38.75,148.26 R6.1 34,142.149 J4.3 39.123,122.562 U1.27
PIN_SW_3: J4.4 J7.1 R7.1 U1.26 | length 160
  Top w0.15: J7.1 38.75,248.845 40.07,247.525 40.07,148.44 R7.1 48.895,139.615 J4.4 41.663,122.562 U1.26
PIN_SW_4: J4.5 J8.1 R8.1 U1.6 | length 160.9
  Top w0.15: U1.6 47.913,95.531 47.913,114.966 51.435,118.488 J4.5 51.435,138.945 R8.1 58.75,146.26 J8.1
PIN_SW_5: J4.6 J9.1 R9.1 U1.7 | length 187.5
  Top w0.15: U1.7 52.993,98.071 52.993,128.812 J4.6 54.238,130.057 54.238,130.748 R9.1 60.07,150.44 60.07,247.525 58.75,248.845 J9.1
PIN_SW_18: J1.1 J4.8 R1.1 U1.18 | length 180.2
  Top w0.15: U1.18 59.055,117.609 J4.8 75.284,129.794 R1.1 80.391,152.119 80.391,216.553 80.07,216.874 80.07,247.525 78.75,248.845 J1.1
PIN_SW_19: J2.1 J4.7 R2.1 U1.19 | length 147.3
  Top w0.15: U1.19 56.515,117.609 J4.7 56.612,129.891 57.502,129.891 71.121,143.51 R2.1 79.04,144.55 79.04,202.026 78.75,202.316 J2.1
Reset_Croco: R10.1 U2.4 U4.36 | length 249
  Top w0.15: U4.36 217.507,105.708 227.203,96.012 v1(238.925,96.012) ; v1(260.477,96.012) 372.103,96.012 R10.1
  Bottom w0.15: v1(238.925,96.012) v1(260.477,96.012) ; U2.4@394.201,59.182 394.201,63.754 R10.1
Reset_Pot: R19.1 U3.4 U4.35 | length 218.3
  Top w0.15: U4.35 218.674,147.296 258.63,147.296 259.47,148.135 259.47,151.647 260.604,152.781 322.915,152.781 365.741,195.607 372.476,195.607 U3.4 R19.1
Reset_Switch: R3.1 U1.4 U4.38 | length 204.8
  Top w0.15: U1.4 47.005,83.939 73.244,83.939 R3.1 105.164,115.859 184.903,115.859 U4.38
SCL: J19.4 R23.2 U1.9 U2.9 U3.9 U4.5 | length 609.2
  Top w0.15: U4.5 255.607,148.567 271.579,164.539 ; v1(278.892,157.226) 271.579,164.539 ; U3.9 347.325,183.156 290.196,183.156 271.579,164.539
  Bottom w0.15: U1.9 52.995,90.649 56.9,90.649 59.44,90.649 61.98,90.649 64.52,90.649 ccw(c64.52,90.656) 64.525,90.651 66.99,90.651 214.74,90.651 cw(c215.519,89.685) 216.298,90.651 263.578,90.651 R23.2 276.058,103.131 276.058,115.276 276.098,115.316 J19.4 276.352,154.686 v1(278.892,157.226) ; U3.9 381.466,206.023 380.296,204.853 380.296,60.479 U2.9
SDA: J19.3 R22.1 U1.8 U2.8 U3.8 U4.3 | length 610.8
  Top w0.15: U4.3 258.147,150.716 263.387,155.956 278.892,155.956 ; v1(278.892,153.797) 278.892,155.956 ; U3.8 322.665,155.956 278.892,155.956
  Bottom w0.15: U1.8 50.686,90.418 50.732,90.372 137.172,90.372 137.174,90.374 214.845,90.374 cw(c215.519,89.685) 216.193,90.374 271.689,90.374 271.733,90.418 R22.1 278.892,108.245 J19.3 v1(278.892,153.797) ; U3.8 384.006,206.023 382.836,204.853 382.836,60.479 U2.8
VUSB: C1.1 C2.1 C3.1 J17.1 J18.1 J20.1 J21.1 J23.A4 J24.1 J25.1 J26.1 J27.1 J28.1 M1.5 M2.5 M3.5 M4.5 R26.2 R27.2 U1.13 U1.14 U2.13 U2.14 U3.13 U3.14 U4.2 U4.4
pads on no net: J23. J23.A6 J23.A7 J23.A8 J23.A9 J23.B4 J23.B6 J23.B7 J23.B8 J23.B9 U1.2 U1.3 U1.11 U1.12 U1.21 U1.22 U1.24 U2.2 U2.3 U2.11 U2.12 U2.21 U2.22 U2.24 U3.2 U3.3 U3.6 U3.18 U3.19 U3.21 U3.22 U3.24 U3.26 U3.27 U3.28 U3.29 U4.7 U4.8 U4.10 U4.11 U4.13 U4.15 U4.21 U4.23 U4.27 U4.28 U4.29 U4.31 U4.41 U4.42 U4.43 U4.44

## Polygon pours and split planes (outlines as drawn)
VUSB on Top "VUSB_L01_P010" (solid, pour order 10): 0.318,45.254 ccw(c45.318,45.254) 45.318,0.254 385.318,0.254 ccw(c385.318,45.254) 430.318,45.254 430.318,244.873 ccw(c385.318,244.873) 385.318,289.873 45.318,289.873 ccw(c45.318,244.873) 0.318,244.873
3V3 on Top "3V3_L01_P005" (solid, pour order 5): 247.781,150.114 ccw(c248.031,150.114) 248.031,149.864 256.54,149.864 ccw(c256.54,150.114) 256.79,150.114 256.79,269.625 341.122,269.625 ccw(c341.122,269.875) 341.372,269.875 341.372,278.511 ccw(c341.122,278.511) 341.122,278.761 248.031,278.761 ccw(c248.031,278.511) 247.781,278.511
3V3 on Top "3V3_L01_P003" (solid, pour order 3): 214.63,64.262 214.63,120.396 419.608,120.396 419.608,64.262
GND on Bottom "GND_L02_P011" (solid, pour order 11): 0.318,45.254 0.318,244.873 cw(c45.318,244.873) 45.318,289.873 385.318,289.873 cw(c385.318,244.873) 430.318,244.873 430.318,45.254 cw(c385.318,45.254) 385.318,0.254 45.318,0.254 cw(c45.318,45.254)
3V3 on Bottom "3V3_L02_P009" (solid, pour order 9): 6.354,64.262 6.354,164.592 cw(c6.604,164.592) 6.604,164.842 94.234,164.842 cw(c94.234,164.592) 94.484,164.592 94.484,151.511 cw(c94.234,151.511) 94.234,151.261 27.174,151.261 27.174,89.658 218.313,89.658 cw(c218.313,89.408) 218.563,89.408 218.563,64.262 cw(c218.313,64.262) 218.313,64.012 6.604,64.012 cw(c6.604,64.262)

## Silkscreen, mask and mechanical layers (free items; w line width, h text height)
Top Overlay:
  drawing of 43 lines, arcs and shapes, not listed
  text "pot" at 343.662,274.363 h1.52
  text "banane" at 343.408,261.366 h1.52
  text "del" at 327.406,248.498 h1.52
  text "bout_lumineux" at 122.818,239.395 h1.52
  text "JLCJLCJLCJLC" at 230.274,182.903 h0.8
  text "Headers Raspberry Pi" at 208.73,139.245 h3
  text "JST" at 257.683,125.857 h1.52
  text "I2C_test" at 273.431,122.047 h1.52
  text ".Projet_Titre" at 138.245,69.531 h3.5
  text "Titre :" at 135.731,69.262 h3
  text ".Projet_nom_du_cours" at 136.239,60.953 h3
  text "Date :" at 137.509,52.729 h3
  text ".Projet_Date" at 145.891,52.698 h3
  text "&" at 75.787,38.347 h13
  text "Conçu par :" at 136.112,37.331 h3
  text ".Projet_Concepteur1" at 147.542,33.267 h3
  text ".Projet_Concepteur2" at 145.891,29.711 h3
  text ".Projet_Concepteur3" at 159.861,17.9 h2
  text ".Projet_Concepteur4" at 159.861,15.614 h2
Board Outline:
  the board outline again, w0.025

## Text inside footprints (layer, text, board x,y; h text height)
C1: Top Overlay "+" at 367.762,228.874 h2 r180
C2: Top Overlay "+" at 356.588,23.896 h2 r180
C3: Top Overlay "+" at 72.545,125.968 h2
C5: Top Overlay "+" at 377.271,245.217 h2
C6: Top Overlay "+" at 386.78,245.217 h2
C7: Top Overlay "+" at 396.289,245.217 h2
REV1: Top Overlay "PCB REV #" at 137.89,48.79 h1
SER1: Top Overlay "SERIAL #" at 145.311,49.032 h1